# EAGLE board OLM-base_v.9REVA (EAGLE 6.4)
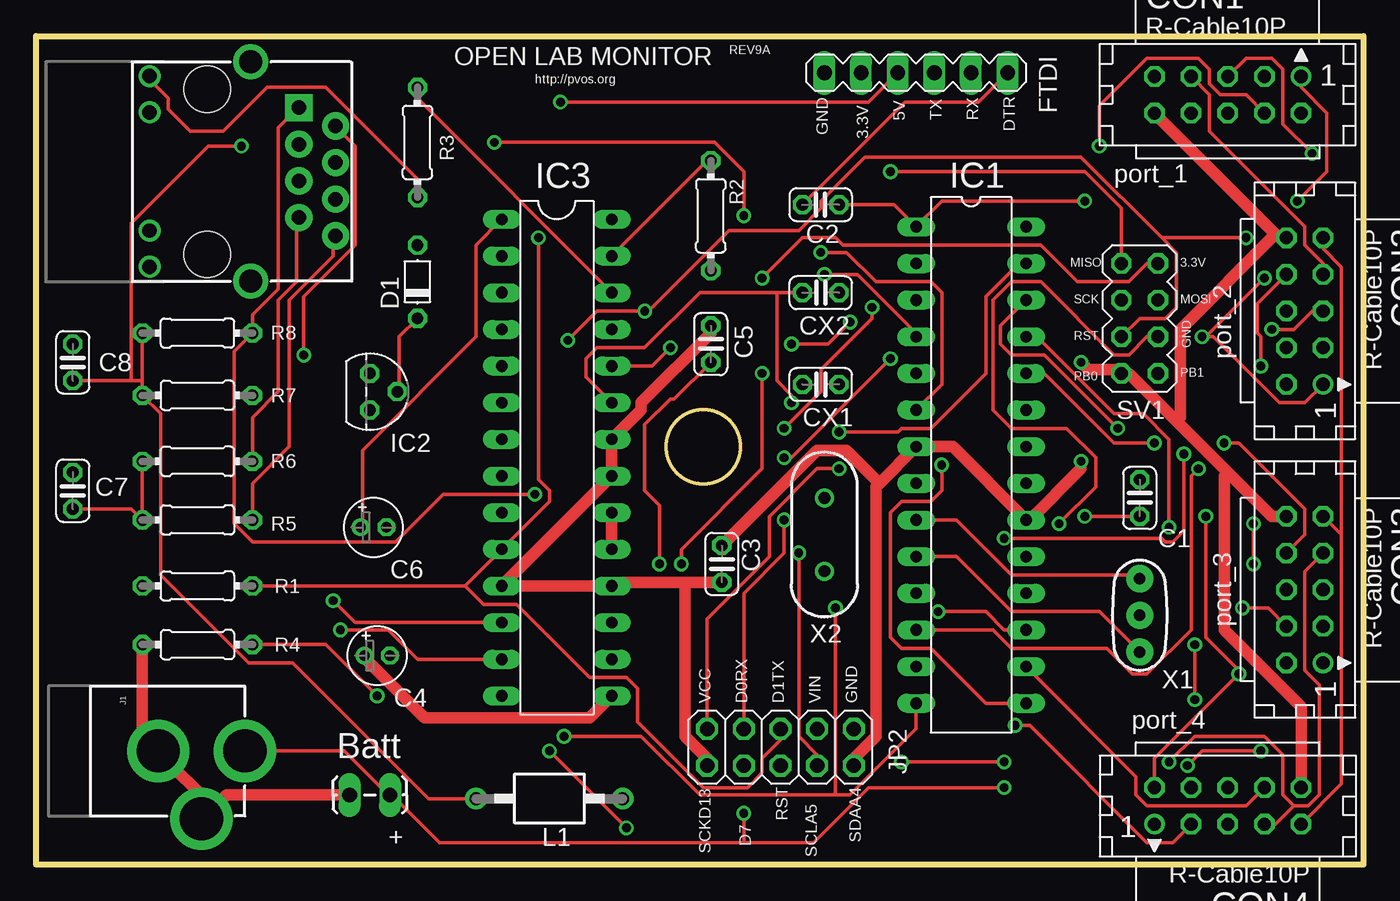
[diagram p0: board, top side]
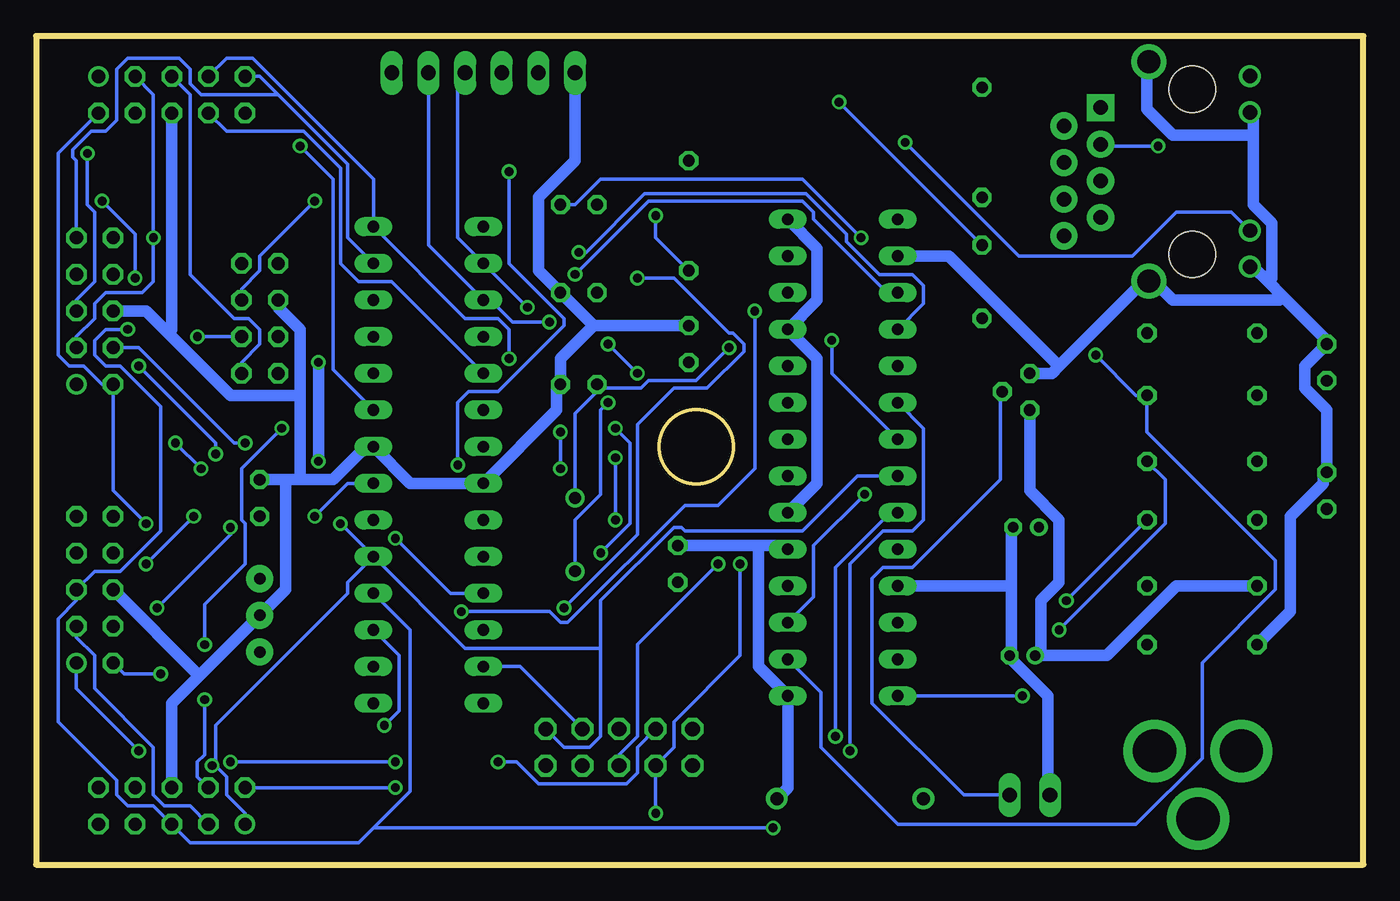
[diagram p1: board, bottom side, seen from below]

Size 91.95 x 57.4 mm. Coordinates in mm from the lower left corner, seen from the top.
Outline: 0,57.4 91.95,57.4 91.95,0 0,0 0,57.4
Outline: circle at 46.23,28.96 radius 2.55
Copper layers (1*16): Top 0.035mm / dielectric 1.5mm / Bottom 0.035mm
Design rules "default": minimum track width 10mil, minimum drill 24mil, track to track 8mil, track to pad 8mil, pad to pad 8mil, via to via 8mil, smd to smd 8mil, copper to edge 40mil, drill to drill 8mil, minimum pad ring 10mil, minimum via ring 8mil, stop-mask expansion 4mil, vias tented up to drill 0mil, thermal gap 10mil
Net classes: 0 default: width 0.254 mm, drill 0.254 mm, clearance 0.254 mm; 1 power: width 0.813 mm, drill 0.254 mm, clearance 0.254 mm; 2 gnd: width 0.305 mm, drill 0.559 mm, clearance 0.254 mm

## Footprints (pad centres in the part's own frame; a part is rotated, then mirrored left to right if it is on the bottom)
C025-024X044 = drill 0.813 octagon: 1 -1.27,0; 2 1.27,0
E1,8-4 = drill 0.711 pad 1.168: + -0.889,0 | drill 0.711 pad 1.168 octagon: - 0.889,0
CON10L = drill 0.914: 1 5.08,1.27 | drill 0.914 octagon: 2 5.08,-1.27; 3 2.54,1.27; 4 2.54,-1.27; 5 0,1.27; 6 0,-1.27; 7 -2.54,1.27; 8 -2.54,-1.27; 9 -5.08,1.27; 10 -5.08,-1.27
D-5 = drill 0.813 octagon: A 2.54,0; C -2.54,0
MA06-1 = drill 1.016 long: 1 0,0; 2 2.54,0; 3 5.08,0; 4 7.62,0; 5 10.16,0; 6 12.7,0
DIL28-3 = drill 0.813 long: 1 -16.51,-3.81; 2 -13.97,-3.81; 3 -11.43,-3.81; 4 -8.89,-3.81; 5 -6.35,-3.81; 6 -3.81,-3.81; 7 -1.27,-3.81; 8 1.27,-3.81; 9 3.81,-3.81; 10 6.35,-3.81; 11 8.89,-3.81; 12 11.43,-3.81; 13 13.97,-3.81; 14 16.51,-3.81; 15 16.51,3.81; 16 13.97,3.81; 17 11.43,3.81; 18 8.89,3.81; 19 6.35,3.81; 20 3.81,3.81; 21 1.27,3.81; 22 -1.27,3.81; 23 -3.81,3.81; 24 -6.35,3.81; 25 -8.89,3.81; 26 -11.43,3.81; 27 -13.97,3.81; 28 -16.51,3.81
TO92 = drill 0.813 octagon: 1 -1.27,0; 2 0,1.905; 3 1.27,0
POWER_JACK_PTH = drill 2.997 pad 4.318: GND 0,7.7; GNDBREAK 4.7,10.7; PWR 0,13.7
MAGJACK = drill 1 pad 1.88 square: 1 3.175,17.445 | drill 1 pad 1.88: 2 4.445,19.985; 3 5.715,17.445; 4 6.985,19.985; 5 8.255,17.445; 6 9.525,19.985; 7 10.795,17.445; 8 12.065,19.985 | drill 1 pad 1.27: 9 1,7.1; 10 3.5,7.1; 11 11.7,7.1; 12 14.2,7.1 | drill 1.6 pad 2.184: M1 0,14.1; M2 15.2,14.1 | hole 3.2: 1.905,11.095; 13.335,11.095
1X02_LOCK_LONGPADS = drill 1.016 long: 1 -0.127,0; 2 2.667,0
2X05 = drill 1.016 octagon: 1 -5.08,-1.27; 2 -5.08,1.27; 3 -2.54,-1.27; 4 -2.54,1.27; 5 0,-1.27; 6 0,1.27; 7 2.54,-1.27; 8 2.54,1.27; 9 5.08,-1.27; 10 5.08,1.27
BL01RN1A = drill 0.9 pad 1.5: 1 -5.08,0; 2 5.08,0
0204/7 = drill 0.813 octagon: 1 -3.81,0; 2 3.81,0
MA04-2 = drill 0.9 octagon: 1 -3.81,-1.27; 2 -3.81,1.27; 3 -1.27,-1.27; 4 -1.27,1.27; 5 1.27,-1.27; 6 1.27,1.27; 7 3.81,-1.27; 8 3.81,1.27
RESONATOR-PTH = drill 0.8 pad 1.88: 1 -2.54,0; 2 0,0; 3 2.54,0
HC49US = drill 0.813: 1 -2.54,0; 2 2.54,0

## Placement (x,y rotation side)
C1  0.1µ  [C025-024X044]  76.45,25.4 90 top
C2  0.1µ  [C025-024X044]  54.36,45.72 180 top
C3  0.1µ  [C025-024X044]  47.5,20.83 270 top
C4  10µ  [E1,8-4]  23.62,14.48 0 top
C5  0.1µ  [C025-024X044]  46.74,36.07 90 top
C6  10u  [E1,8-4]  23.37,23.37 0 top
C7  0.1µ  [C025-024X044]  2.54,25.91 270 top
C8  0.1µ  [C025-024X044]  2.54,34.8 270 top
CON1  [CON10L]  82.55,53.34 0 top
CON2  [CON10L]  87.88,38.35 270 top
CON3  [CON10L]  87.88,19.05 270 top
CON4  [CON10L]  82.55,4.06 180 top
CX1  18p  [C025-024X044]  54.36,33.27 0 top
CX2  18p  [C025-024X044]  54.36,39.62 0 top
D1  [D-5]  26.42,40.39 90 top
FTDI  FTDI  [MA06-1]  54.61,54.86 0 top
IC1  ATMEGA  [DIL28-3]  64.77,27.69 270 top
IC2  MCP1702-33  [TO92]  23.11,32.77 270 top
IC3  ENC28J60SP  [DIL28-3]  36.07,28.19 270 top
J1  POWER_JACKPTH  [POWER_JACK_PTH]  0.76,7.87 270 top
J2  MAGJACK  [MAGJACK]  0.76,55.63 270 top
JP1  BATT  [1X02_LOCK_LONGPADS]  24.38,4.83 180 top
JP2  [2X05]  51.56,8.13 180 top
L1  BL01RN1A  [BL01RN1A]  35.56,4.57 0 top
R1  10k  [0204/7]  11.18,19.3 180 top
R2  1K  [0204/7]  46.74,44.96 270 top
R3  1K  [0204/7]  26.42,50.04 270 top
R4  2.32K  [0204/7]  11.18,15.24 180 top
R5  49.9  [0204/7]  11.18,23.88 180 top
R6  49.9  [0204/7]  11.18,27.94 0 top
R7  49.9  [0204/7]  11.18,32.51 180 top
R8  49.9  [0204/7]  11.18,36.83 0 top
SV1  SPI/ISP  [MA04-2]  76.45,37.85 90 top
X1  16 MHz  [RESONATOR-PTH]  76.45,17.27 270 top
X2  25MHz  [HC49US]  54.61,22.86 270 top

## Library data of the parts
C1-C8 CX1 CX2 R1 = resistor
CON1-CON4 = con-harting; OC_FARNELL: unknown; OC_NEWARK: unknown
D1 = diode
FTDI IC2 SV1 = JeeLabs
IC1 = atmega8
IC3 = microchip; MF: MICROCHIP; MPN: ENC28J60/SP; OC_FARNELL: 1084619; OC_NEWARK: 96K3661
J1 = SparkFun-Connectors
J2 JP1 X1 X2 = SparkFun
JP2 = pinhead
L1 = inductors
R2-R8 = rcl

## Nets
A0: CON1.4 IC1.23
A1: CON2.4 IC1.24
A2: CON3.4 IC1.25
A3: CON4.4 IC1.26
D0/RX: FTDI.4 IC1.2 JP2.4
D1/TX: FTDI.5 IC1.3 JP2.6
D2: IC1.4 IC3.3
D3/PWM: CON1.8 IC1.5
D4: IC1.6 IC3.4
D5/PWM: CON2.8 IC1.11
D6/PWM: CON3.8 IC1.12
D7: IC1.13 JP2.3
D10/PWM: CON4.8 IC1.16
GND [power]: C1.2 C3.2 C4.- C5.2 C6.- C7.1 C8.1 CON1.6 CON2.6 CON3.6 CON4.6 CX1.2 CX2.2 FTDI.1 IC1.8 IC1.22 IC2.1 IC3.2 IC3.11 IC3.18 IC3.21 IC3.22 J1.GND J1.GNDBREAK J2.10 J2.12 J2.M1 J2.M2 JP1.2 JP2.10 R4.2 SV1.6 X1.2
LEDA: J2.11 R2.2
LEDB: J2.9 R3.2
MISO/D12: CON1.5 CON2.5 CON3.5 CON4.5 IC1.18 IC3.6 SV1.1
MOSI/D11: CON1.3 CON2.3 CON3.3 CON4.3 IC1.17 IC3.7 SV1.4
N$1: IC1.9 X1.1
N$2: D1.A FTDI.3
N$19: C1.1 IC1.21
N$20: C2.2 FTDI.6
N$21: IC1.10 X1.3
N$37: IC3.27 R2.1
N$39: IC3.26 R3.1
N$50: C6.+ IC3.1
N$51: IC3.14 R4.1
N$52: CX1.1 IC3.24 X2.1
N$53: CX2.1 IC3.23 X2.2
N$54: C7.2 R5.2 R6.1
PB0/D8: IC1.14 IC3.9 SV1.7
PB1/D9/PWM: IC1.15 SV1.8
RD+: IC3.13 J2.7 R6.2
RD-: IC3.12 J2.8 R5.1
RESET: C2.1 IC1.1 IC3.10 JP2.5 R1.1 SV1.5
SCK/D13: CON1.1 CON2.1 CON3.1 CON4.1 IC1.19 IC3.8 JP2.1 SV1.3
SCL/A5: CON1.7 CON2.7 CON3.7 CON4.7 IC1.28 JP2.7
SDA/A4: CON1.9 CON2.9 CON3.9 CON4.9 IC1.27 JP2.9
TCT: C8.2 J2.3 L1.1 R7.2 R8.1
TD+: IC3.17 J2.1 R8.2
TD-: IC3.16 J2.2 R7.1
VCC [power]: C3.1 C4.+ CON1.10 CON2.10 CON3.10 CON4.10 IC1.7 IC1.20 IC2.3 IC3.15 IC3.19 IC3.20 IC3.25 IC3.28 JP2.2 L1.2 R1.2 SV1.2
VIN: C5.1 CON1.2 CON2.2 CON3.2 CON4.2 D1.C IC2.2 J1.PWR JP1.1 JP2.8

## Tracks (layer width: path | path; a pad name or v marks a point on that pad's centre or on a via)
A0  (via drill 0.61)
  Top 0.254: v73.66,49.78 73.66,52.58 76.96,55.88 80.52,55.88 81.28,55.12 81.28,54.1 82.04,53.34 83.82,53.34 CON1.4
  Bottom 0.254: IC1.23 71.37,34.29 71.37,47.5 v73.66,49.78
A1  (via drill 0.61)
  Top 0.254: IC1.24 69.85,34.04 74.68,29.21 v77.47,29.21
  Bottom 0.254: v77.47,29.21 78.23,29.21 84.84,35.81 CON2.4
A2  (via drill 0.61)
  Top 0.254: IC1.25 69.34,36.58 74.68,31.24 76.71,31.24 78.49,29.46 v78.49,23.37 | v83.57,17.78 85.34,17.78 CON3.4
  Bottom 0.254: v78.49,23.37 78.49,22.86 v83.57,17.78
A3  (via drill 0.61)
  Top 0.254: IC1.26 66.8,37.34 66.8,36.07 67.56,35.31 69.85,35.31 v74.93,30.23 | v80.26,11.43 v80.26,15.24
  Bottom 0.254: v74.93,30.23 77.72,27.43 77.72,23.88 77.47,23.62 77.47,20.83 80.26,18.03 v80.26,15.24 | v80.26,11.43 80.26,7.62 80.77,7.11 80.77,6.1 CON4.4
D0/RX  (via drill 0.61)
  Top 0.254: JP2.4 54.1,7.62 52.83,8.89 v52.83,21.59 | v51.82,30.23 54.36,32.77 54.36,34.29 57.91,37.85 v57.91,38.61
  Bottom 0.254: FTDI.4 62.74,54.36 62.74,43.43 IC1.2 v57.91,38.61 | v52.83,21.59 50.8,23.62 50.8,29.21 v51.82,30.23
D1/TX  (via drill 0.61)
  Top 0.254: v44.7,20.83 44.7,21.84 50.29,27.43 v50.29,34.04 | v52.32,36.07 54.86,36.07 v56.39,37.59
  Bottom 0.254: FTDI.5 64.77,42.93 IC1.3 60.45,39.12 58.93,37.59 v56.39,37.59 | JP2.6 51.56,7.62 50.29,8.89 50.29,15.24 v44.7,20.83 | v52.32,36.07 v50.29,34.04
D2  (via drill 0.61)
  Top 0.254: v54.61,40.89 56.9,40.89 60.96,36.83 IC1.4
  Bottom 0.254: IC3.3 33.02,39.62 38.1,44.7 38.1,45.21 38.86,45.97 49.53,45.97 v54.61,40.89
D3/PWM
  Bottom 0.254: IC1.5 67.31,40.39 69.6,40.39 70.87,41.66 70.87,48.26 73.41,50.8 78.74,50.8 CON1.8
D4  (via drill 0.61)
  Top 0.254: IC1.6 62.74,33.27 62.74,39.62 61.98,40.39 58.17,40.39 56.13,42.42 v54.36,42.42
  Bottom 0.254: v54.36,42.42 53.85,42.42 49.78,46.48 38.61,46.48 35.81,43.69 35.81,43.18 33.53,40.89 31.24,40.89 30.48,40.13 30.48,38.86 IC3.4
D5/PWM  (via drill 0.61)
  Top 0.254: v67.06,22.61 77.98,22.61 78.23,22.35 78.74,22.35 79.5,23.11 v79.5,28.45 | v84.84,34.54 84.84,36.58 84.58,36.83 84.58,38.86 CON2.8
  Bottom 0.254: IC1.11 63.25,18.8 v67.06,22.61 | v79.5,28.45 79.5,29.21 v84.84,34.54
D6/PWM  (via drill 0.61)
  Top 0.254: IC1.12 66.29,16.26 67.56,14.99 74.17,14.99 75.95,13.21 76.96,13.21 80.01,16.26 80.01,26.92 v80.52,27.43 | v82.3,29.21 83.31,29.21 87.88,24.64 87.88,22.86 CON3.8
  Bottom 0.254: v82.3,29.21 v80.52,27.43
D7
  Bottom 0.254: IC1.13 58.42,13.72 JP2.3
D10/PWM
  Top 0.254: IC1.16 76.2,6.1 76.2,4.83 76.96,4.06 83.82,4.06 CON4.8
GND
  Top 0.813: R4.2 7.37,8.89 8.38,7.87 J1.GND 8.64,7.62 12.19,4.06 J1.GNDBREAK 11.68,3.3 13.21,4.83 JP1.2 | 44.96,19.56 40.13,19.56 IC3.18 IC3.11 IC3.21 IC3.22 41.91,31.5 41.91,32 46.74,36.83 C5.2 | 44.96,19.56 C3.2 | JP2.10 46.48,7.37 44.96,8.89 44.96,19.56
  Bottom 0.813: 53.34,37.34 C5.2 | 53.34,37.34 CX2.2 57.15,41.15 57.15,46.23 54.61,48.77 FTDI.1 | 53.34,37.34 55.63,35.05 CX1.2 55.88,33.02 55.88,31.5 IC1.8 66.04,26.42 IC1.22 68.83,29.21 71.37,26.67 73.66,26.67 | CON4.6 82.55,11.18 80.64,13.08 | 80.64,13.08 X1.2 74.68,19.05 74.68,26.67 | 80.64,13.08 CON3.6 | 73.66,26.67 74.68,26.67 | 74.68,26.67 C1.2 | SV1.6 75.18,38.61 73.66,37.08 73.66,32.51 | 73.66,26.67 73.66,32.51 | CON2.6 84.33,38.35 82.8,36.83 | 82.8,36.83 78.49,32.51 73.66,32.51 | CON1.6 82.55,37.08 82.8,36.83 | IC2.1 21.59,34.04 21.08,34.54 | 21.08,34.54 14.99,40.64 J2.M2 14.48,40.39 13.21,39.12 5.84,39.12 5.59,39.37 | IC3.2 28.7,42.16 21.08,34.54 | 5.59,39.37 2.54,36.32 C8.1 4.06,34.54 4.06,33.02 2.54,31.5 C7.1 2.79,26.92 2.79,26.42 5.08,24.13 5.08,17.53 R4.2 | 5.59,39.37 6.6,40.39 | 6.6,40.39 7.62,41.4 J2.12 | 7.62,50.55 7.62,45.72 6.35,44.45 6.35,40.64 6.6,40.39 | 7.62,50.55 7.62,52.07 J2.10 | 7.62,50.55 13.21,50.55 14.99,52.32 14.99,55.63 J2.M1 | 24.38,19.3 24.38,14.48 C4.- 24.38,14.22 21.84,11.68 21.84,4.83 JP1.2 | 24.38,19.3 24.38,23.37 C6.- | IC3.11 24.38,19.3
LEDA  (via drill 0.61)
  Top 0.254: v49.02,44.96 49.02,48.01 46.99,50.04 v31.75,50.04
  Bottom 0.254: R2.2 49.02,43.43 v49.02,44.96 | v31.75,50.04 23.88,42.16 16,42.16 12.95,45.21 9.14,45.21 7.87,43.94 J2.11
LEDB
  Top 0.254: R3.2 26.42,47.5 20.07,53.85 16,53.85 12.95,50.8 10.67,50.8 9.14,52.32 9.14,53.09 7.62,54.61 J2.9
MISO/D12  (via drill 0.61)
  Top 0.254: v88.39,49.28 86.36,51.31 86.36,55.12 85.6,55.88 83.82,55.88 CON1.5 | v40.89,2.54 v35.56,7.87 | CON2.5 88.39,38.35 87.12,37.08 v85.6,37.08
  Bottom 0.254: SV1.1 77.72,34.8 76.45,36.07 76.45,37.08 77.22,37.85 78.23,37.85 81.28,40.89 81.28,53.34 CON1.5 | CON2.5 89.15,39.12 87.88,40.39 87.88,45.21 88.39,45.72 v88.39,49.28 | IC1.18 66.04,16.26 66.04,5.08 68.58,2.54 | 68.58,2.54 69.6,1.52 81.28,1.52 CON4.5 83.82,4.06 85.6,4.06 86.36,4.83 86.36,5.84 90.42,9.91 90.42,17.02 89.15,18.29 CON3.5 87.88,20.32 86.11,20.32 83.31,23.11 83.31,31.75 86.11,34.54 87.12,34.54 87.88,35.31 87.88,36.32 87.12,37.08 v85.6,37.08 | IC3.6 30.48,30.23 30.48,23.88 31.24,23.11 33.27,23.11 35.56,20.83 v35.56,7.87 | 68.58,2.54 v40.89,2.54
MOSI/D11  (via drill 0.61)
  Top 0.254: v67.82,9.65 68.83,9.65 76.96,1.52 78.74,1.52 CON4.3 | v36.83,36.32 38.86,38.35 v42.16,38.35 42.42,38.35 48.01,43.94 52.83,43.94 54.36,45.47 54.36,45.97 57.4,49.02 72.39,49.02 77.98,43.43 | 77.98,43.43 78.99,42.42 78.99,38.61 78.23,37.85 76.45,37.85 SV1.4 | 77.98,43.43 v83.82,43.43 | IC1.17 67.06,16.26 65.79,17.53 v62.48,17.53
  Bottom 0.254: IC1.17 66.8,14.48 66.8,10.67 v67.82,9.65 | CON3.3 89.15,15.75 87.88,14.48 87.88,12.19 83.82,8.13 83.82,4.83 83.06,4.06 81.28,4.06 CON4.3 | CON2.3 89.15,36.58 87.88,37.85 87.88,38.86 87.12,39.62 84.58,39.62 83.82,40.39 v83.82,43.43 83.82,53.34 CON1.3 | IC3.7 36.83,34.04 v36.83,36.32 | v62.48,17.53 56.39,17.53 55.63,16.76 55.12,16.76 46.99,24.89 44.7,24.89 42.16,27.43 v42.16,38.35
N$1
  Top 0.254: IC1.9 63.75,23.88 67.56,20.07 76.2,20.07 X1.1
N$2  (via drill 0.61)
  Top 0.254: v36.32,52.83 57.66,52.83 FTDI.3
  Bottom 0.254: v36.32,52.83 D1.A
N$19  (via drill 0.61)
  Top 0.254: C1.1 v72.64,24.13
  Bottom 0.254: IC1.21 70.36,26.42 v72.64,24.13
N$20
  Top 0.254: C2.2 60.2,52.83 65.28,52.83 FTDI.6
N$21
  Top 0.254: IC1.10 63.75,21.34 67.56,17.53 73.66,17.53 X1.3
N$37
  Top 0.254: IC3.27 46.48,48.77 R2.1
N$39
  Top 0.254: IC3.26 26.42,53.09 R3.1
N$50
  Top 0.254: IC3.1 30.48,42.93 30.48,36.58 22.61,28.7 22.61,23.37 C6.+
N$51  (via drill 0.61)
  Top 0.254: R4.1 20.07,15.24 v23.62,11.68
  Bottom 0.254: IC3.14 v23.62,11.68
N$52  (via drill 0.61)
  Top 0.254: IC3.24 42.67,34.54 v43.94,35.81
  Bottom 0.254: v43.94,35.81 46.23,33.53 49.53,33.53 50.04,33.02 52.83,33.02 | X2.1 54.61,31.24 52.83,33.02 | 52.83,33.02 CX1.1
N$53  (via drill 0.61)
  Top 0.254: IC3.23 38.1,33.78 38.1,35.05 38.86,35.81 42.16,35.81 45.97,39.62 51.31,39.62 | CX2.1 51.31,39.62 | v52.32,32 52.32,32.51 51.31,33.53 51.31,39.62
  Bottom 0.254: X2.2 54.61,23.88 52.83,25.65 52.83,31.5 v52.32,32
N$54
  Top 0.254: C7.2 6.6,24.64 R5.2 R6.1
PB0/D8  (via drill 0.61)
  Top 0.254: v36.58,8.89 41.91,8.89 45.97,4.83 55.37,4.83 | 55.37,4.83 56.39,4.83 60.96,9.4 IC1.14 | SV1.7 76.96,41.66 75.69,40.39 72.14,40.39 69.6,42.93 55.88,42.93 55.37,43.43 53.09,43.43 v50.29,40.64 | 55.37,4.83 v55.37,17.78
  Bottom 0.254: IC3.9 32.77,24.38 36.58,20.57 v36.58,8.89 | v50.29,40.64 47.75,40.64 43.94,36.83 43.69,36.83 42.93,36.07 42.93,35.56 45.47,33.02 47.75,33.02 50.29,30.48 50.29,22.86 v55.37,17.78
PB1/D9/PWM  (via drill 0.61)
  Top 0.254: IC1.15 65.79,11.18 61.98,14.99 59.94,14.99 59.18,15.75 59.18,24.38 59.94,25.15 61.98,25.15 62.74,25.91 v62.74,27.69 | v59.18,48.01 72.64,48.01 75.18,45.47 SV1.8
  Bottom 0.254: v62.74,27.69 62.74,32 61.98,32.77 59.94,32.77 55.37,37.34 55.37,37.85 59.18,41.66 v59.18,48.01
RD+  (via drill 0.61)
  Top 0.254: R6.2 14.99,30.99 16.76,32.77 16.76,39.12 18.03,40.39 18.03,44.7 J2.7 | IC3.13 26.42,14.22 24.38,16.26 v21.08,16.26
  Bottom 0.254: v21.08,16.26 13.72,23.62 13.72,26.67 R6.2
RD-  (via drill 0.61)
  Top 0.254: R5.1 14.99,26.42 17.53,28.96 17.53,39.12 20.57,42.16 20.57,43.43 J2.8 | IC3.12 22.1,16.76 v20.57,18.29
  Bottom 0.254: R5.1 v20.57,18.29
RESET  (via drill 0.61)
  Top 0.254: C2.1 59.44,45.72 IC1.1 62.74,45.97 v72.64,45.97 | 29.72,19.3 R1.1 | 29.72,19.3 IC3.10 35.56,25.15 35.56,25.91 34.8,26.67 v34.8,43.43 | JP2.5 51.56,8.64 50.29,7.37 50.29,6.35 49.28,5.33 46.23,5.33 41.66,9.91 41.66,12.19 40.89,12.95 38.35,12.95 33.27,18.03 30.99,18.03 29.72,19.3
  Bottom 0.254: SV1.5 77.72,39.88 76.45,41.15 76.45,42.16 v72.64,45.97 | C2.1 54.61,45.72 52.83,47.5 38.86,47.5 v34.8,43.43
SCK/D13  (via drill 0.61)
  Top 0.254: 81.03,36.58 81.53,36.58 86.11,32 87.88,32 CON2.1 | CON1.1 87.63,53.85 89.41,52.07 89.41,48.01 v87.38,45.97 | 81.03,36.58 v85.09,40.64 | 81.03,36.58 v80.77,36.58 | v84.84,7.87 80.77,7.87 v79.76,6.86 | SV1.3 76.96,36.58 75.69,35.31 74.68,35.31 69.6,40.39 67.56,40.39 66.29,39.12 66.29,31.5 67.56,30.23 71.37,30.23 73.41,28.19 73.41,26.16 v70.87,23.62
  Bottom 0.254: v80.77,36.58 SV1.3 | v87.38,45.97 85.09,43.69 v85.09,40.64 | IC3.8 35.05,26.92 38.86,23.11 46.99,23.11 47.24,23.37 47.75,23.37 52.83,18.29 52.83,14.99 | 52.83,14.99 52.83,8.89 53.59,8.13 55.37,8.13 JP2.1 | IC1.19 62.23,14.99 52.83,14.99 | CON4.1 77.47,3.56 78.74,4.83 78.74,6.1 79.5,6.86 | 79.5,6.86 79.5,9.65 70.36,18.8 70.36,19.56 IC1.19 | CON3.1 89.15,12.19 v84.84,7.87 | 79.5,6.86 v79.76,6.86 | IC1.19 v70.87,23.62
SCL/A5  (via drill 0.61)
  Top 0.254: CON4.7 85.85,2.79 87.12,4.06 | 87.12,4.06 88.14,4.06 88.9,4.83 88.9,12.45 87.88,13.46 87.88,20.32 CON3.7 | CON2.7 89.15,41.66 87.88,42.93 87.88,44.2 81.28,50.8 81.28,53.34 CON1.7 | JP2.7 49.02,18.8 51.82,21.59 v51.82,23.88 | v51.82,28.19 52.32,28.19 v59.18,35.05 | 87.12,4.06 86.36,4.83 86.36,7.62 85.09,8.89 80.26,8.89 v78.49,7.11 | v59.94,7.11 v67.06,7.11
  Bottom 0.254: CON1.7 78.74,55.88 76.96,55.88 68.58,47.5 IC1.28 62.23,37.85 59.94,37.85 59.18,37.08 v59.18,35.05 | v51.82,28.19 v51.82,23.88 | v67.06,7.11 v78.49,7.11 | v59.94,7.11 58.67,7.11 57.15,5.59 51.05,5.59 50.29,6.35 50.29,8.13 JP2.7
SDA/A4  (via drill 0.61)
  Top 0.254: CON4.9 90.42,5.59 90.42,22.86 | CON3.9 90.42,22.86 | CON2.9 89.15,42.67 90.42,41.4 90.42,22.86 | JP2.9 46.48,17.02 50.8,21.34 50.8,24.13 54.1,27.43 v55.63,27.43 | v55.63,29.97 59.69,29.97 59.94,30.23 61.98,30.23 65.79,34.04 65.79,39.37 68.07,41.66 IC1.27
  Bottom 0.254: IC1.27 70.36,43.43 70.36,48.51 75.18,53.34 | 75.18,53.34 76.45,54.61 CON1.9 | v55.63,29.97 v55.63,27.43 | CON2.9 89.15,48.77 89.41,49.02 89.41,49.53 88.14,50.8 87.12,50.8 86.36,51.56 86.36,55.12 85.6,55.88 82.04,55.88 81.28,55.12 81.28,54.1 80.52,53.34 75.18,53.34
TCT  (via drill 0.61)
  Top 0.254: R8.1 7.37,33.53 | 7.37,33.53 R7.2 8.64,31.24 8.64,20.07 14.73,13.97 17.78,13.97 27.18,4.57 L1.1 | 7.37,33.53 6.6,33.53 | 6.6,33.53 C8.2 | v14.22,49.78 11.94,49.78 6.6,44.45 6.6,33.53
  Bottom 0.254: v14.22,49.78 18.03,49.78 J2.3
TD+  (via drill 0.61)
  Top 0.254: J2.1 18.03,52.32 16.76,51.05 16.76,39.88 14.99,38.1 R8.2 13.72,35.56 13.72,23.62 14.99,22.35 24.89,22.35 28.19,25.65 v34.54,25.65
  Bottom 0.254: IC3.17 38.1,18.54 38.1,22.1 v34.54,25.65
TD-  (via drill 0.61)
  Top 0.254: v18.54,35.31 18.54,39.37 22.1,42.93 22.1,49.78 20.83,51.05 J2.2
  Bottom 0.254: v18.54,35.31 15.75,32.51 R7.1 14.99,29.97 6.1,21.08 6.1,19.05 11.18,13.97 11.18,7.37 15.75,2.79 32.26,2.79 37.59,8.13 37.59,11.94 IC3.16
VCC  (via drill 0.61)
  Top 0.813: CON2.10 86.11,43.43 85.85,43.69 | CON1.10 85.85,43.69 | 82.55,27.18 85.6,24.13 CON3.10 | 82.55,27.18 78.99,30.73 | 78.99,30.73 75.69,34.04 SV1.2 74.93,34.29 72.9,34.29 v72.39,34.8 | CON4.10 87.63,10.92 82.3,16.26 82.3,26.92 82.55,27.18 | 85.85,43.69 79.25,37.08 79.25,30.99 78.99,30.73 | JP2.2 56.64,7.37 58.17,8.89 58.17,26.16 58.42,26.42 | 58.42,26.42 IC1.7 63.5,28.96 IC1.20 68.83,23.88 72.39,27.43 v72.39,27.94 | IC3.20 IC3.19 | IC3.15 38.35,10.16 26.92,10.16 22.86,14.22 22.86,14.48 C4.+ | 58.42,26.42 56.13,28.7 54.1,28.7 C3.1
  Bottom 0.813: R1.2 12.95,19.3 17.78,14.48 C4.+ 22.35,14.73 22.35,18.29 21.08,19.56 21.08,23.88 23.11,25.91 IC2.3 | L1.2 39.88,5.33 IC3.15 41.91,13.72 41.91,22.1 | IC3.28 37.85,42.67 37.85,39.12 IC3.25 37.85,35.05 37.85,26.42 IC3.20 | 41.91,22.1 40.13,22.1 IC3.19 | 41.91,22.1 C3.1 | v72.39,27.94 v72.39,34.8
VIN  (via drill 0.61)
  Top 0.254: C5.1 44.2,32.26 43.94,32.26 42.16,30.48 42.16,25.91 43.18,24.89 v43.18,20.83 | CON4.2 77.47,7.37 v83.31,13.21 83.31,13.46 81.03,15.75 v81.03,24.13 | D1.C 25.15,36.58 25.15,32.77 IC2.2 | J1.PWR 21.34,7.87 24.38,4.83 JP1.1 24.64,4.83 27.94,1.52 49.02,1.52 | v67.06,5.33 57.66,5.33 53.85,1.52 49.02,1.52 | v84.33,20.83 v84.33,23.62 | 49.02,1.52 v49.02,3.56
  Bottom 0.254: v43.18,20.83 43.18,14.48 47.75,9.91 47.75,8.13 JP2.8 v49.02,3.56 | CON1.2 90.42,49.28 90.42,35.31 89.66,34.54 88.65,34.54 87.38,33.27 CON2.2 86.61,25.91 v84.33,23.62 | v83.31,13.21 85.85,13.21 CON3.2 | JP1.1 27.69,4.83 34.04,11.18 34.04,19.81 33.27,20.57 31.24,20.57 25.15,26.67 25.15,32.77 IC2.2 | v67.06,5.33 CON4.2 | v81.03,24.13 v84.33,20.83

## Text on the board
tPlace: REV9A | OPEN LAB MONITOR | http://pvos.org | 5V | TX | RX | GND | DTR | 3.3V | port_1 | MISO | 3.3V | SCK | MOSI | RST | GND | port_2 | PB0 | PB1 | port_3 | X1 | VCC | D0RX | D1TX | VIN | GND | port_4 | Batt | RST | SDAA4 | + | SCKD13 | D7 | SCLA5